# Altium PCB PCB3.PcbDoc
Units mil, origin at the board's own origin, x right, y up, seen from the top; angles counter-clockwise.
Board outline 1615 x 2280 mil, 2 copper layers (Top Layer, Bottom Layer); 7 components, 6 nets, 19 pads, 0 vias.
Unrouted connection lines stored in the file: 9.
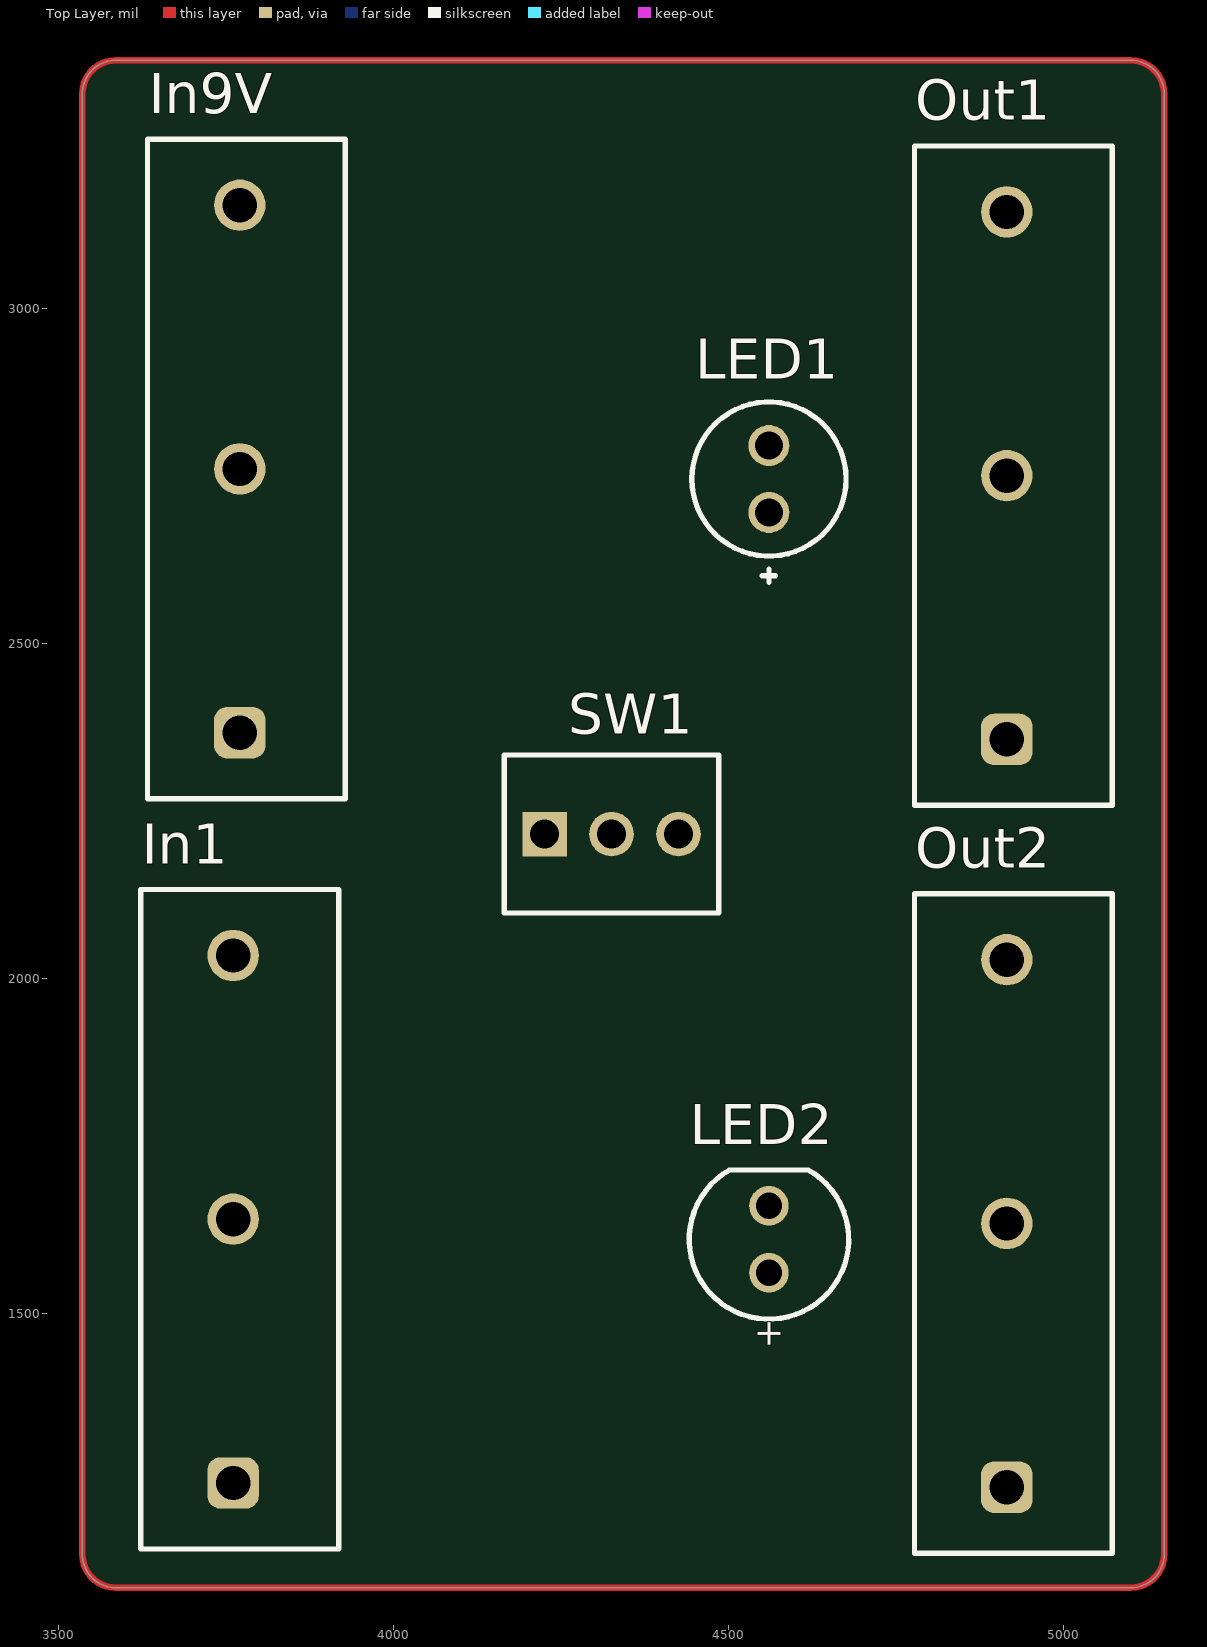
[diagram p0: Top Layer view]
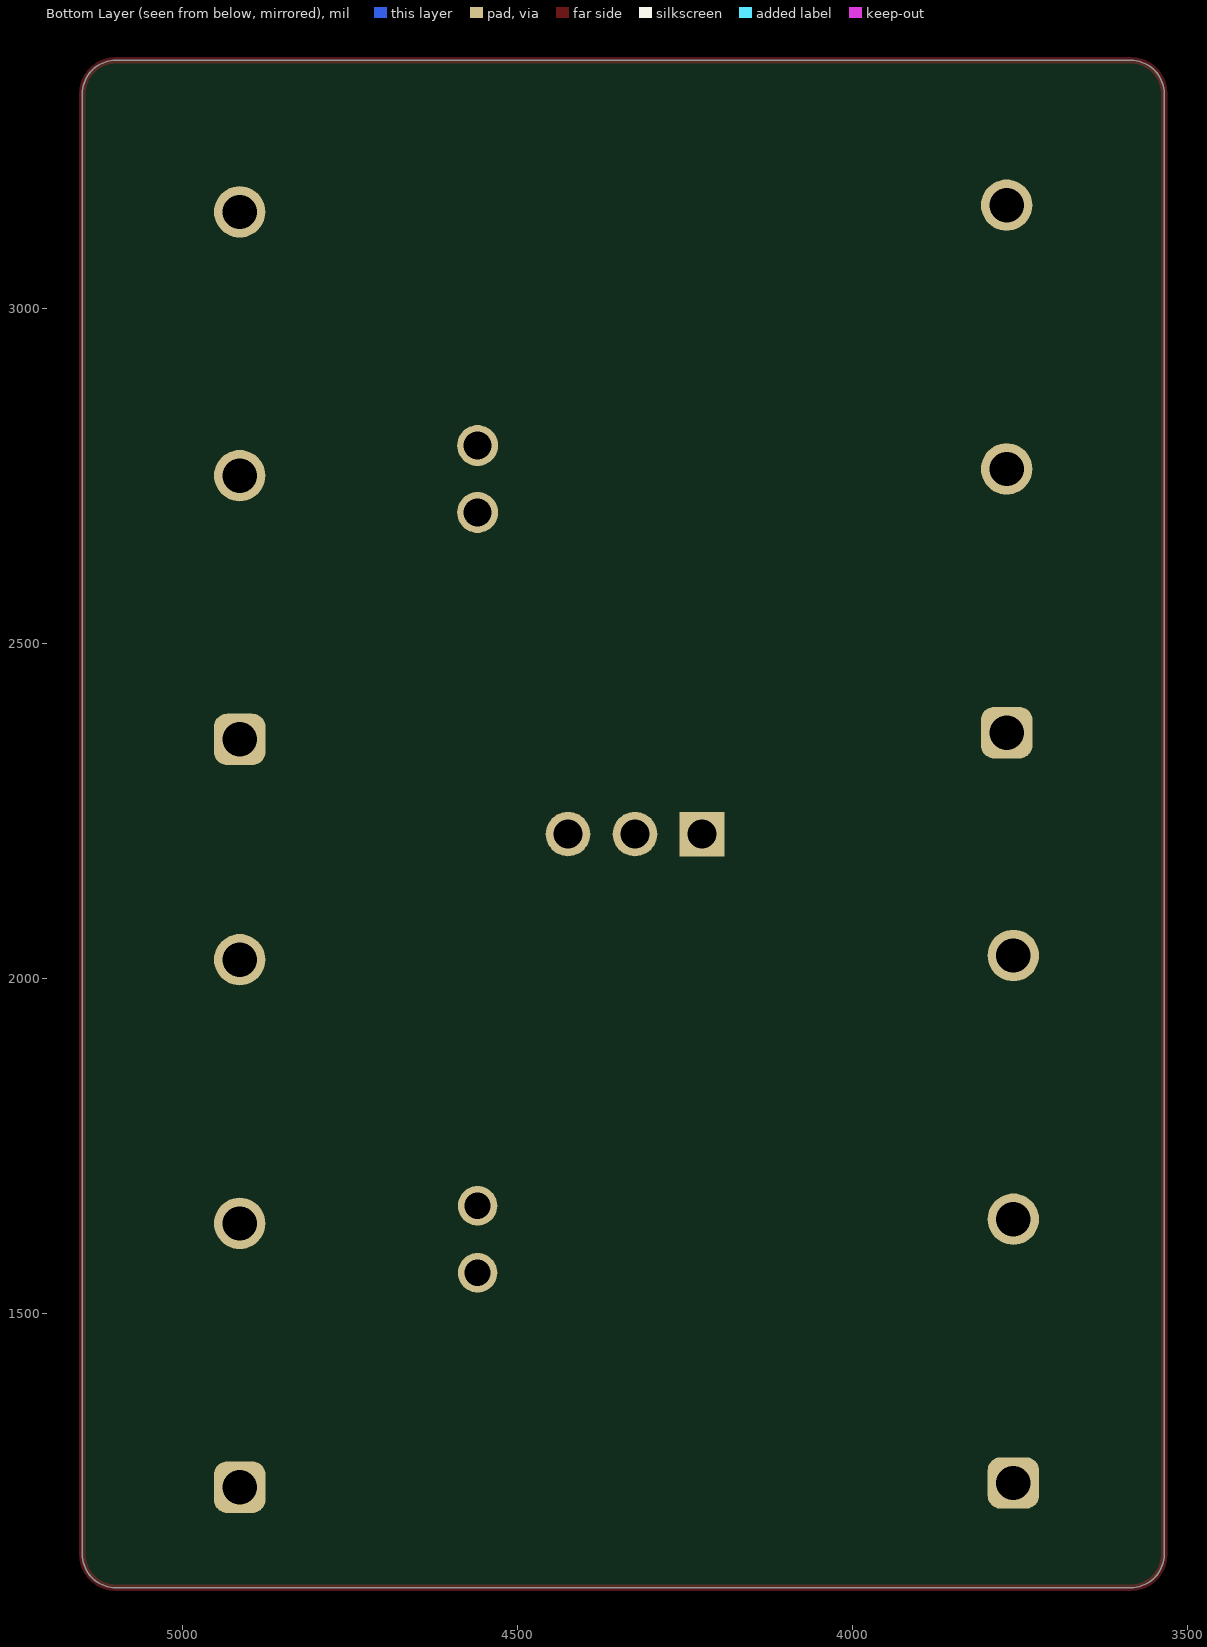
[diagram p1: Bottom Layer view, seen from below]

## Layer stack, top to bottom
Top Solder: solder mask 0.4, Solder Resist, Dk 3.5
Top Layer: signal copper 1.4
Dielectric 1: dielectric 12.6, FR-4, Dk 4.8
Bottom Layer: signal copper 1.4
Bottom Solder: solder mask 0.4, Solder Resist, Dk 3.5

## Board outline
3535,1140 ccw(c3585,1140) 3585,1090 5100,1090 ccw(c5100,1140) 5150,1140 5150,3320 ccw(c5100,3320) 5100,3370 3585,3370 ccw(c3585,3320) 3535,3320

## Design rules (kind name [scope] priority, off if disabled: settings)
Clearance [All] p1: gap=10 ignorepadtopadclearanceinfootprint=FALSE
PolygonConnect [All] p1: connectstyle=Relief reliefconductorwidth=10 reliefentries=4 polygonreliefangle="90 Angle" airgapwidth=10
RoutingVias [All] p1: holewidth=28 width=50 viastyle="Through Hole" minholewidth=28 minwidth=50 maxholewidth=28 maxwidth=50
SolderMaskExpansion [All] p1: expansion=4 istentingtop=FALSE
SupplyNets "Schematic Supply Nets_1" [InNet('+9V')] p1: voltage=0.000
SupplyNets "Schematic Supply Nets" [InNet('GND')] p2: voltage=0.000
Width [All] p1: maxlimit=10 minlimit=10 preferedwidth=10
30 further rules are at their usual default settings.

## Components (designator, comment, footprint, x,y, rotation, side; value= is the part's Value field where it differs from the comment)
In1 "691137810003" 691137810003 3770,1640 r90 top
In9V "691137810003" 691137810003 3780,2760 r90 top
LED1 "HLMP-3507" AVAG-HLMP-3507 4560,2745 r90 top
LED2 "15400594F3590" WL-TIRC_5mm 4560,1610 r90 top
Out1 "691137810003" 691137810003 4924.84,2750 r90 top
Out2 "691137810003" 691137810003 4924.84,1633.7 r90 top
SW1 "TT11AGPC104" FP-TT11AGPC104-MFG 4325,2215 r0 top

## Footprints (in the part's own frame and the unit in brackets; to place one, negate y for a bottom-side part, rotate by r counter-clockwise, add the part's x,y. Pads: shape width x height; smd on the part's side, far side on the other; paste and mask are expansions set on the pad)
691137810003 [mm] "Serie 1378 - 10.00 mm_3 pins"
  rrect50% 1.95x1.95 hole 1.3: 1(-10,0.25)
  round 1.95 hole 1.3: 2(0,0.25) 3(10,0.25)
  silkscreen extent -12.5,-3.75 12.5,3.75, body extent -12.5,-3.75 12.5,3.75, height 11.6
AVAG-HLMP-3507 [mm] "THD, 2-Leads, Dia 5.845mm, Pitch 2.54mm"
  round 1.55 hole 1.05: 1(-1.27,0) 2(1.27,0)
  silkscreen extent -3.92,-2.92 2.92,2.92
FP-TT11AGPC104-MFG [mm]
  rect 1.69x1.69 hole 1.09 paste-2539.97 mask+0: 1(-2.54,0)
  round 1.69 hole 1.09 paste-2539.97 mask+0: 2(0,0) 3(2.54,0)
  silkscreen extent -4.07,-3 4.07,3, body extent -4.17,-3.1 4.17,3.1, height 0.25
WL-TIRC_5mm [mm]
  round 1.5 hole 1: 1(-1.27,0) 2(1.27,0)
  silkscreen extent -3.02,-3.02 2.63,3.02, body extent -2.9,-2.9 2.5,2.9, height 6.2

## Part data
In1 In9V Out1 Out2: library part CMP-1502-03382-2, NexarPartId=105950636
LED1: library part CMP-2000-06412-1, "T-1 3/4 (5 mm) Diffused LED Lamp, Green, 2.1 V, -20 to 100 degC, 2-Pin THD, RoHS, Bulk", Emitting Color=YellowGreen, Forward Current=25mA, Forward Voltage=2.7V, Manufacturer=Avago, Operating Temp Range=-40Cto100C, Operating Temperature Classification=Industrial, Package Description="2-Pin Through Hole Device, Dia 5.845 mm, Pitch 2.54 mm", Package Type=T-13/4, Power Dissipation=85W, Reverse Voltage=5V, Test Current (It)=10mA, Chip Material=GaP, Datasheet URL=http://docs.avagotech.com/docs/AV02-1558EN, Datasheet Version=03/2015, DELETED=Compliant, Dominant Wave Length=569nm, High Brightness=No, Lens Dimensions=5.08x5.08x8.3mm, Lens Type=ColoredDiffused, Lum Intensity=4.2mcd, Luminous Intensity=4.2mcd, Main Category=StandardLED, Manufacturer URL=http://www.avagotech.com/, Mounting=ThroughHole, Mounting Technology=ThroughHole, Number of  Elements=1, Package Reference=HLMP-3507, Peak Wavelength=565nm, Pin Count=2, Product Depth (mm)=6.1mm, Product Height (mm)=9.19mm, Product Length (mm)=6.1mm, Rad Hardened=No, Shape Type=Circular, Type=Uni-Color, Viewing Angle=60deg
LED2: library part CMP-03913-110288041-1, "15400594F3590 Led, 5Mm, 940Nm, 30Mw/Sr, Th Rohs Compliant: Yes", Forward Current=1A, Forward Voltage=1.3V, Max Operating Temperature=85°C, Max Reverse Voltage (DC)=5V, Min Operating Temperature=-40°C, NexarPartId=110288041, Peak Wavelength=940nm, RoHS=Compliant, Viewing Angle=30°
SW1: library part CMP-03408-000020-1, "SWITCH TOGGLE SPST 0.4VA 20V", Contact Current Rating=3A, Max Operating Temperature=85°C, Max Voltage Rating (AC)=20V, Min Operating Temperature=-30°C, Package Quantity=25, Power Rating=400mW, Actuator Length=5.61mm, Actuator Type=Toggle, Contact Plating=Gold, Illumination Type=Illuminated, Max Voltage Rating (DC)=20V, Mount=Brackets, Orientation=Straight, Packaging=Bulk, RoHS Compliant=Yes, Series="TT (Tiny)", Termination="PC Pins", Throw Configuration=SPST, Voltage Rating (AC)=20V, Voltage Rating (DC)=20V

## Nets (pads, with @x,y where several pads share a name; then routed paths per layer and width w, separated by ;. In a path a pad name is that pad's centre, name@x,y a point inside that pad or via, vN(x,y) a via of type N, cw(c..) or ccw(c..) an arc to the next point about the centre after c; other vN are vias at no path point)
+9V: In9V.1
GND: In1.2 Out1.2 Out2.2 SW1.2
NetIn1_1: In1.1 In9V.2
NetLED1_1: LED1.1 LED2.1
NetLED1_2: LED1.2 Out1.1 SW1.1
NetLED2_2: LED2.2 Out2.1 SW1.3
pads on no net: In1.3 In9V.3 Out1.3 Out2.3
copper on no net: | length 7704.2
  Top Layer w10: 3535,1140 ccw(c3585,1140) 3585,1090 5100,1090 ccw(c5100,1140) 5150,1140 5150,3320 ccw(c5100,3320) 5100,3370 4345,3370 3585,3370 ccw(c3585,3320) 3535,3320 3535,1140

## Text inside footprints (layer, text, board x,y; h text height)
LED2: Top Overlay "+" at 4577.72,1446.61 h39.37 r90